# EAGLE board IoTKitV3 (EAGLE 9.2.0)
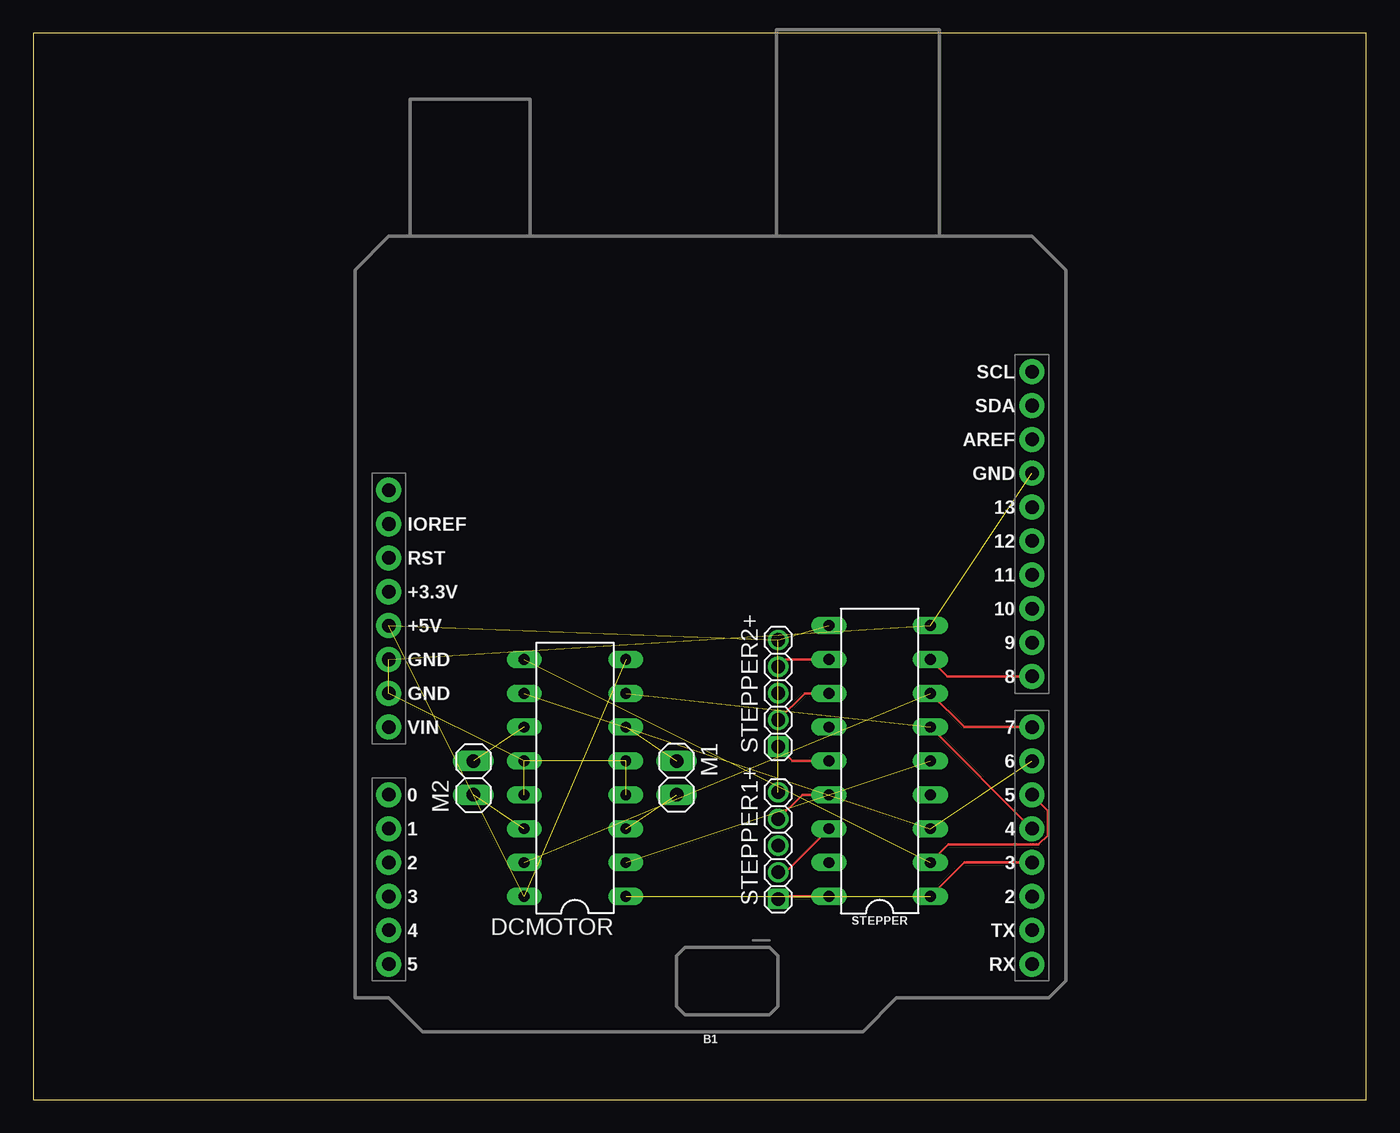
[diagram p0: board, top side]
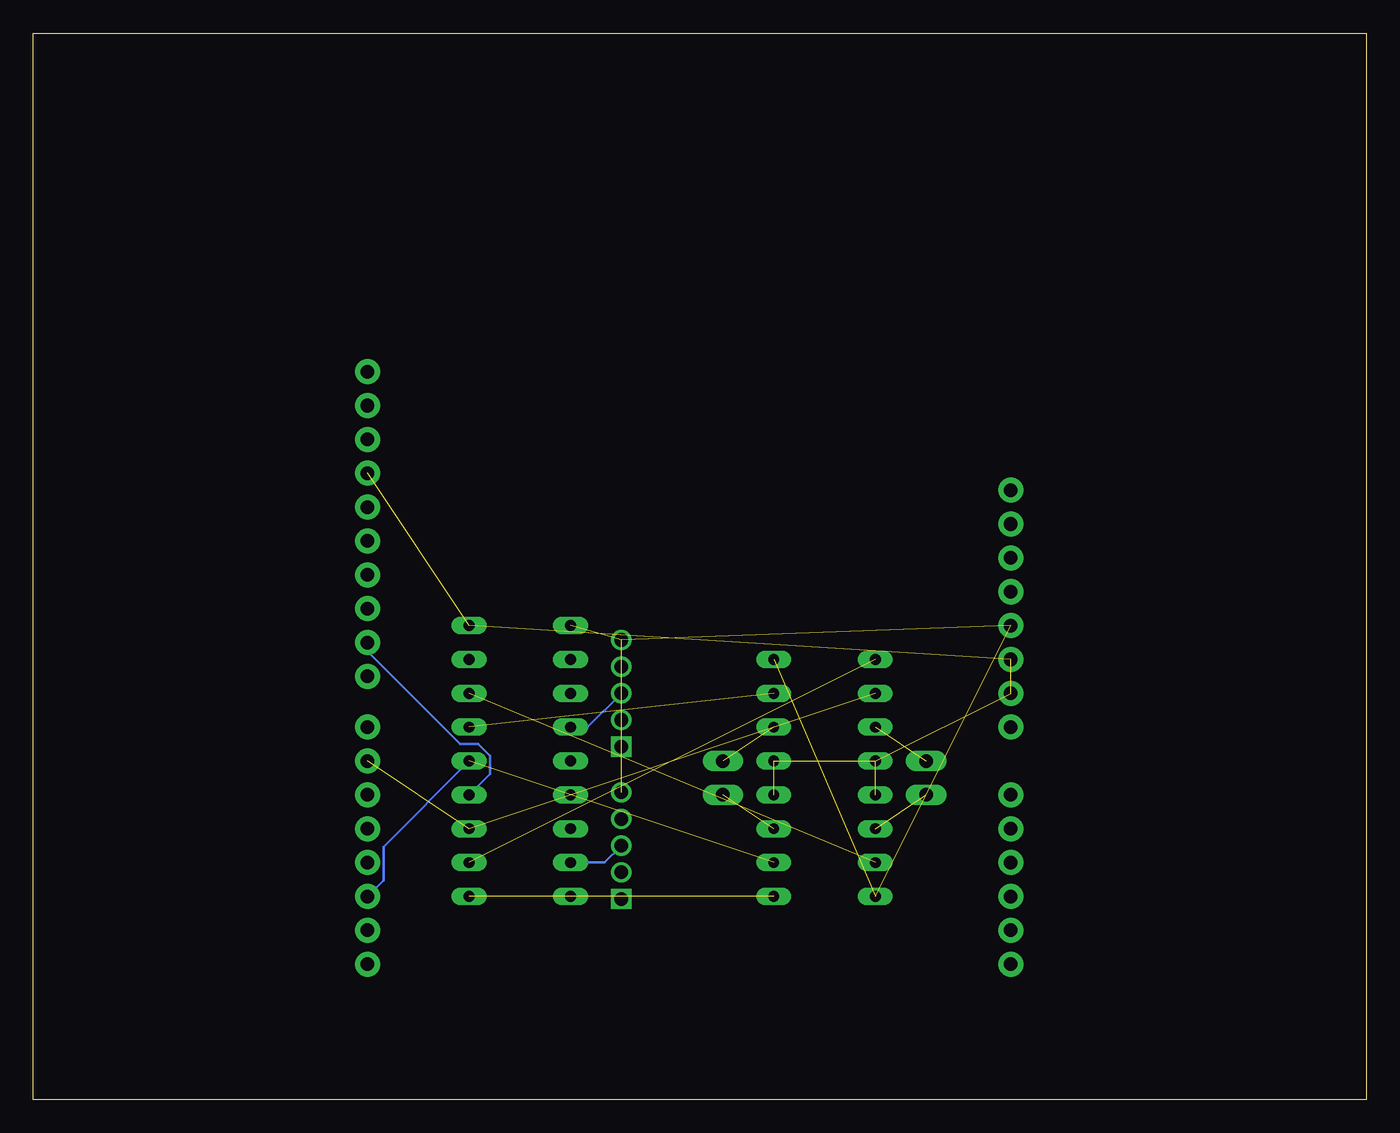
[diagram p1: board, bottom side, seen from below]

Size 100 x 80 mm. Coordinates in mm from the lower left corner, seen from the top.
Outline: 0,0 100,0 100,80 0,80 0,0
Copper layers (1*16): Top 0.035mm / dielectric 1.5mm / Bottom 0.035mm
Design rules "default": minimum track width 6mil, minimum drill 0.35mm, track to track 6mil, track to pad 6mil, pad to pad 6mil, via to via 6mil, smd to smd 6mil, copper to edge 40mil, drill to drill 6mil, minimum pad ring 10mil, minimum via ring 8mil, stop-mask expansion 4mil, vias tented up to drill 0mil, thermal gap 10mil

## Footprints (pad centres in the part's own frame; a part is rotated, then mirrored left to right if it is on the bottom)
UNO_R3_SHIELD = drill 1.016 pad 1.88: 3.3V 24.13,-2.54; 5V 24.13,0; A0 24.13,12.7; A1 24.13,15.24; A2 24.13,17.78; A3 24.13,20.32; A4 24.13,22.86; A5 24.13,25.4; AREF -24.13,-13.97; D2 -24.13,20.32; D3 -24.13,17.78; D4 -24.13,15.24; D5 -24.13,12.7; D6 -24.13,10.16; D7 -24.13,7.62; D8 -24.13,3.81; D9 -24.13,1.27; D10 -24.13,-1.27; D11 -24.13,-3.81; D12 -24.13,-6.35; D13 -24.13,-8.89; GND@0 24.13,2.54; GND@1 24.13,5.08; GND@2 -24.13,-11.43; IOREF 24.13,-7.62; NC 24.13,-10.16; RES 24.13,-5.08; RX -24.13,25.4; SCL -24.13,-19.05; SDA -24.13,-16.51; TX -24.13,22.86; VIN 24.13,7.62
DIL16 = drill 0.813 long: 1 -8.89,-3.81; 2 -6.35,-3.81; 3 -3.81,-3.81; 4 -1.27,-3.81; 5 1.27,-3.81; 6 3.81,-3.81; 7 6.35,-3.81; 8 8.89,-3.81; 9 8.89,3.81; 10 6.35,3.81; 11 3.81,3.81; 12 1.27,3.81; 13 -1.27,3.81; 14 -3.81,3.81; 15 -6.35,3.81; 16 -8.89,3.81
1X02 = drill 1.016 long: 1 -1.27,0; 2 1.27,0
DIL18 = drill 0.813 long: 1 -10.16,-3.81; 2 -7.62,-3.81; 3 -5.08,-3.81; 4 -2.54,-3.81; 5 0,-3.81; 6 2.54,-3.81; 7 5.08,-3.81; 8 7.62,-3.81; 9 10.16,-3.81; 10 10.16,3.81; 11 7.62,3.81; 12 5.08,3.81; 13 2.54,3.81; 14 0,3.81; 15 -2.54,3.81; 16 -5.08,3.81; 17 -7.62,3.81; 18 -10.16,3.81
1_05X2MM = drill 1.016 pad 1.3 square: 1 -4,0 | drill 1.016 pad 1.3: 2 0,0; 3 -2,0; 4 2,0; 5 4,0

## Placement (x,y rotation side)
B1  ARDUINO_UNO_R3_SHIELDBASIC  [UNO_R3_SHIELD]  50.8,35.56 180 top
DCMOTOR  L293D  [DIL16]  40.64,24.13 90 top
M1  [1X02]  48.26,24.13 270 top
M2  [1X02]  33.02,24.13 90 top
STEPPER  [DIL18]  63.5,25.4 90 top
STEPPER1+  [1_05X2MM]  55.88,19.05 90 top
STEPPER2+  [1_05X2MM]  55.88,30.48 90 top

## Library data of the parts
B1 = SparkFun-Boards
DCMOTOR = st-microelectronics; MPN: L293D; OC_FARNELL: 9589619; OC_NEWARK: 56P8249
M1 M2 STEPPER1+ STEPPER2+ = pinhead
STEPPER = SparkFun-IC-Special-Function

## Nets
+5V: B1.5V DCMOTOR.8 DCMOTOR.16 STEPPER1+.5 STEPPER2+.5 STEPPER.10
A0: B1.A0
D2: B1.D2 DCMOTOR.2 STEPPER.5
D3: B1.D3 DCMOTOR.1 STEPPER.1
D4: B1.D4 DCMOTOR.7 STEPPER.6
D5: B1.D5 DCMOTOR.9 STEPPER.2
D6: B1.D6 DCMOTOR.10 STEPPER.3
D7: B1.D7 DCMOTOR.15 STEPPER.7
D8: B1.D8 STEPPER.8
D9: B1.D9 STEPPER.4
GND: B1.GND@0 B1.GND@1 B1.GND@2 DCMOTOR.4 DCMOTOR.5 DCMOTOR.12 DCMOTOR.13 STEPPER.9
N$1: STEPPER1+.1 STEPPER.18
N$2: STEPPER1+.2 STEPPER.17
N$3: STEPPER1+.3 STEPPER.16
N$4: STEPPER1+.4 STEPPER.15
N$5: STEPPER2+.1 STEPPER.14
N$6: STEPPER2+.2 STEPPER.13
N$7: STEPPER2+.3 STEPPER.12
N$8: STEPPER2+.4 STEPPER.11
N$11: DCMOTOR.3 M1.2
N$12: DCMOTOR.6 M1.1
N$14: DCMOTOR.14 M2.1
N$15: DCMOTOR.11 M2.2

## Tracks (layer width: path | path; a pad name or v marks a point on that pad's centre or on a via)
+5V  (5 unrouted)
D2  (1 unrouted)
  Bottom 0.203: STEPPER.5 73.74,18.97 73.74,16.43 B1.D2
D3  (1 unrouted)
  Top 0.203: STEPPER.1 69.85,17.78 B1.D3
D4  (1 unrouted)
  Top 0.203: STEPPER.6 B1.D4
D5  (1 unrouted)
  Top 0.203: STEPPER.2 68.66,19.13 75.42,19.13 76.12,19.82 76.12,21.67 B1.D5
D6  (2 unrouted)
D7  (1 unrouted)
  Top 0.203: STEPPER.7 69.85,27.94 B1.D7
D8
  Top 0.203: STEPPER.8 68.58,31.75 B1.D8
D9
  Bottom 0.203: STEPPER.4 65.73,24.43 65.73,25.78 66.63,26.67 67.99,26.67 74.93,33.61 B1.D9
GND  (7 unrouted)
N$1
  Top 0.203: STEPPER1+.1 56.07,15.24 STEPPER.18
N$2
  Bottom 0.203: STEPPER1+.2 57.15,17.78 STEPPER.17
N$3
  Top 0.203: STEPPER1+.3 56.42,17.05 STEPPER.16
N$4
  Top 0.203: STEPPER1+.4 57.69,22.86 STEPPER.15
N$5
  Top 0.203: STEPPER2+.1 56.96,25.4 STEPPER.14
N$6
  Bottom 0.203: STEPPER2+.2 58.42,27.94 STEPPER.13
N$7
  Top 0.203: STEPPER2+.3 57.88,30.48 STEPPER.12
N$8
  Top 0.203: STEPPER2+.4 56.42,33.02 STEPPER.11
N$11  (1 unrouted)
N$12  (1 unrouted)
N$14  (1 unrouted)
N$15  (1 unrouted)